# Altium PCB PCB1.PcbDoc (part 2 of 2)
Units mil, origin at the board's own origin, x right, y up, seen from the top; angles counter-clockwise.
Board outline 3308.29 x 3227.82 mil, 2 copper layers (Top Layer, Bottom Layer); 105 components, 80 nets, 433 pads, 304 vias.
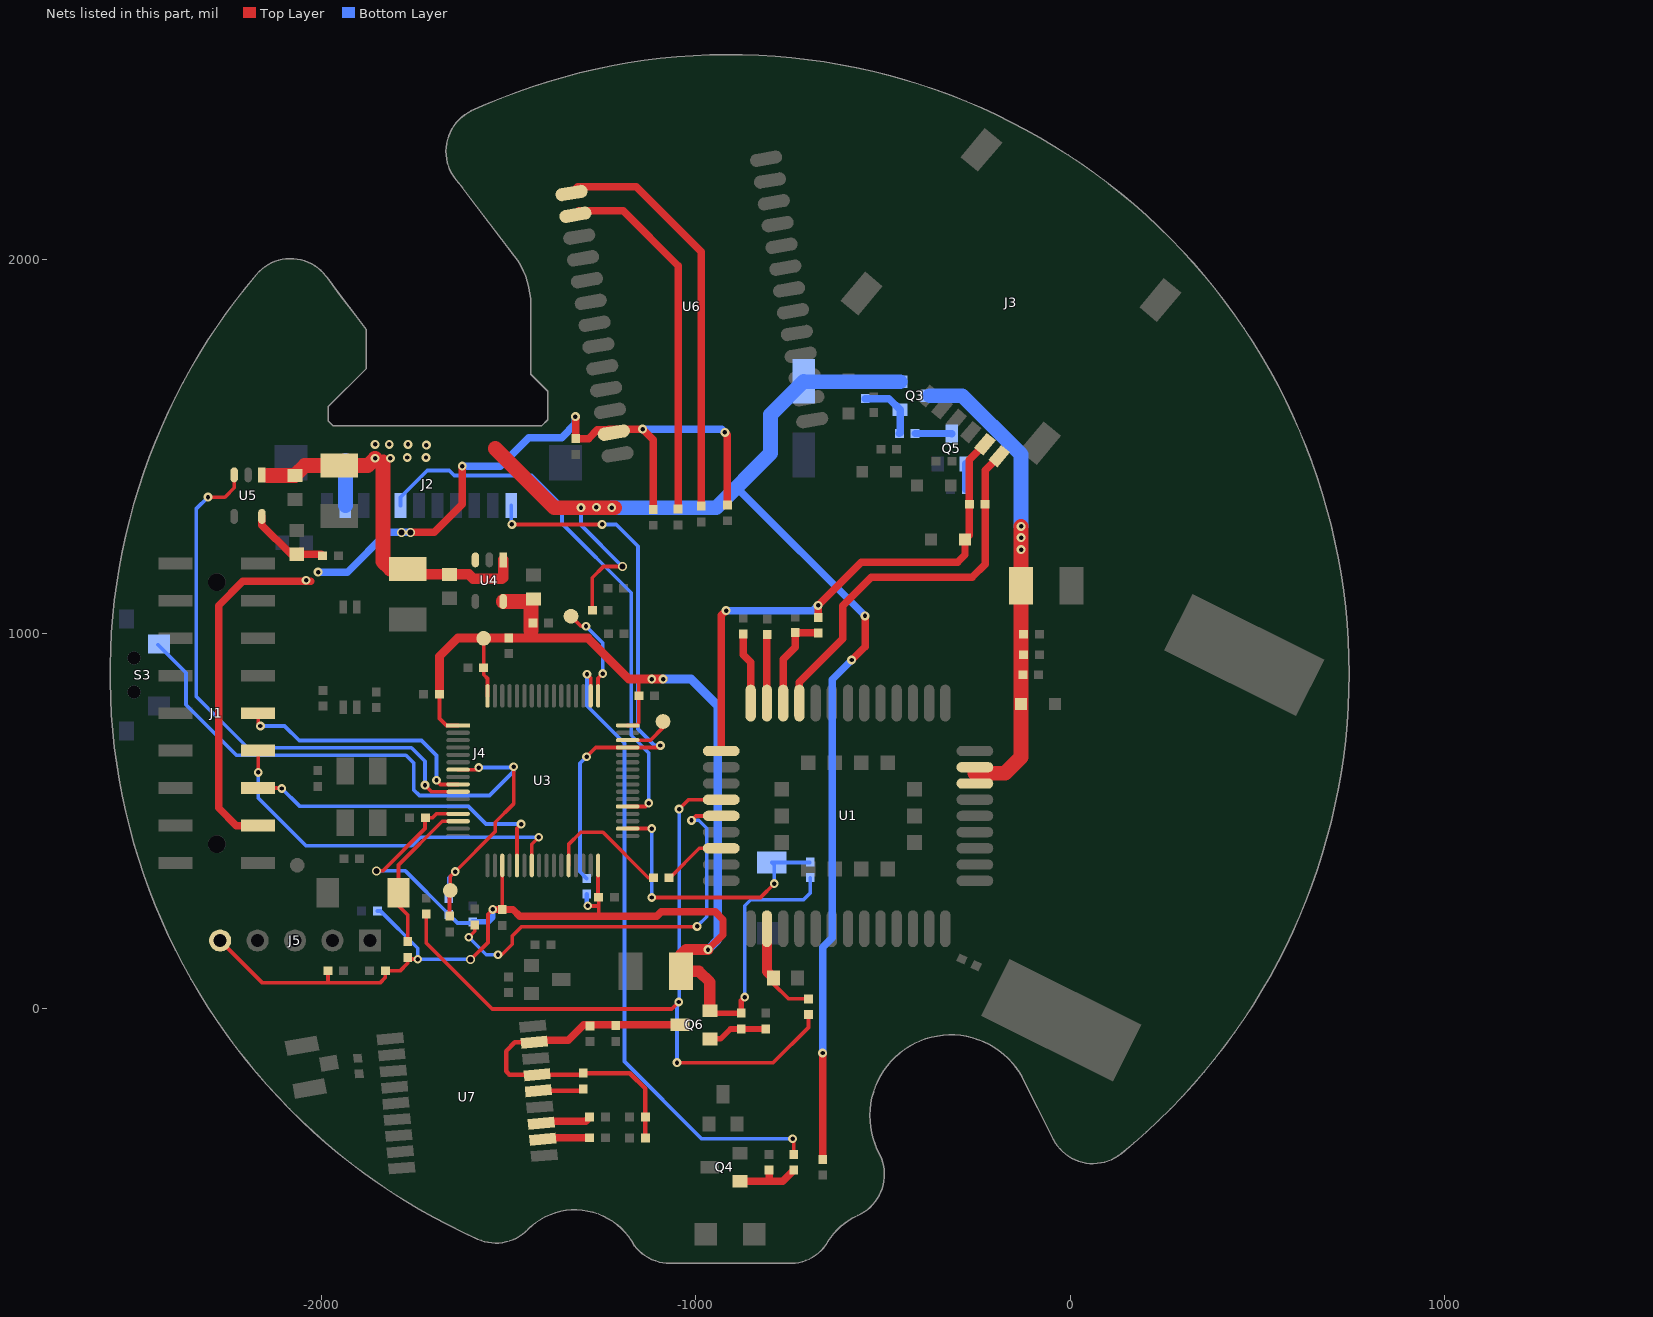
[diagram p2: the nets of this part, all layers, seen from the top]

## Via types
v1: diameter 23.62, hole 11.81, Top Layer to Bottom Layer, 251 vias
v2: diameter 24, hole 16, Top Layer to Bottom Layer, 43 vias
v3: diameter 24, hole 14, Top Layer to Bottom Layer, 10 vias

## Nets (pads, with @x,y where several pads share a name; then routed paths per layer and width w, separated by ;. In a path a pad name is that pad's centre, name@x,y a point inside that pad or via, vN(x,y) a via of type N, cw(c..) or ccw(c..) an arc to the next point about the centre after c; other vN are vias at no path point) (continued)
NetQ3_1: Q3.1 R11.2 R13.2 | length 169.5
  Bottom Layer w19.68: R11.2@-547.32,1627.87 -483.82,1627.87 Q3.1@-454.32,1598.37 -454.32,1536.87 R13.2@-456.32,1534.87
NetQ4_1: Q4.1 R7.2 R12.1 | length 185.7
  Top Layer w20: Q4.1@-882.32,-461.71 -804.32,-461.71 ; R12.1@-804.32,-432.21 -804.32,-461.71 ; R7.2@-738.32,-432.21 -767.82,-461.71 -804.32,-461.71
NetQ5_1: Q5.1 R17.1 | length 67.5
  Bottom Layer w19.68: R17.1@-278.82,1386.37 Q5.1@-278.82,1453.87
NetQ5_3: Q5.3 R13.1 | length 98.4
  Bottom Layer w19.68: R13.1@-414.32,1534.87 -317.32,1534.87 Q5.3@-316.32,1533.87
NetQ6_1: Q6.1 R27.2 R28.2 | length 160
  Top Layer w15: Q6.1@-962.32,-81.71 -933.9,-81.71 -907.32,-55.13 R28.2@-878.32,-55.13 R27.2@-813.32,-55.13
NetR6_1: R6.1 S1.1 U3.34 | length 751.7
  Top Layer w10: U3.34@-1181.94,479.83 v1(-1117.29,479.83) ; v1(-1117.29,295.9) -827.29,295.9 v1(-790.32,332.87)
  Bottom Layer w10: v1(-1117.29,295.9) v1(-1117.29,479.83) ; v1(-790.32,332.87) -790.32,382.36 S1.1@-797.32,389.36 R6.1@-695.83,389.36
NetR9_1: R9.1 S2.1 U3.14 | length 414.4
  Top Layer w10: S2.1@-1812.83,293.32 -1769,249.49 R9.1@-1769,178 ; S2.1@-1793.51,309 -1793.51,382.68 -1676.67,499.52 U3.14@-1634.7,499.52
NetR15_2: R15.2 U1.20 | length 171.9
  Top Layer w10: R15.2@-1071.32,348.87 -1069.13,348.87 -990.83,427.17 U1.20@-931.9,427.17
NetR16_2: R16.2 U1.18 | length 1121.6
  Top Layer w10: v1(-1606.28,189.91) -1590.32,205.87 R16.2@-1590.32,222.87 ; v1@-1526.5,144.5 v1(-1528,143) -1518,143 -1490,171 -1490,193 -1465.09,217.91 -997.28,217.91 v1(-996.28,218.91) ; v1(-1011.28,501.91) -999.4,513.79 U1.18@-931.9,513.79
  Bottom Layer w10: v1(-1606.28,189.91) -1559.36,143 v1(-1528,143) ; v1(-1011.28,501.91) -991.91,501.91 -970.62,480.62 -970.62,244.57 v1(-996.28,218.91)
NetR18_2: R18.2 R19.2 U1.17 | length 2058.8
  Top Layer w10: R18.2@-1719.28,251.91 -1719.28,173.91 -1543.28,-2.09 -1064.28,-2.09 v1(-1045.28,16.91) ; v1(-1050,-145) -793,-145 -699,-51 R19.2@-699,-17 ; v1(-1044.28,531.91) -1019.09,557.09 U1.17@-931.9,557.09
  Bottom Layer w10: v1(-1050,-145) -1050,12.19 v1(-1045.28,16.91) -1044.28,17.91 v1(-1044.28,531.91)
NetR29_1: R29.1 U7.5 | length 121.8
  Top Layer w12: U7.5@-1419.99,-220.28 -1305.46,-220.28 R29.1@-1300.32,-215.13
NetR30_1: R30.1 U7.3 | length 135.9
  Top Layer w20: U7.3@-1412.44,-306.56 -1395.75,-306.56 -1390.32,-301.13 -1294.24,-301.13 R30.1@-1283.32,-290.21
NetR33_1: R33.1 U7.2 | length 127.2
  Top Layer w20: U7.2@-1408.67,-349.7 -1405.1,-346.13 -1284.24,-346.13 R33.1@-1283.32,-345.21
NetR34_2: R34.2 U6.1 | length 1089
  Top Layer w20: U6.1@-1320.85,2187.96 -1314.94,2193.87 -1159.32,2193.87 -985.32,2019.87 R34.2@-985.32,1340.87
NetR37_2: R37.2 U6.2 | length 970
  Top Layer w20: U6.2@-1312.63,2129.48 -1193.93,2129.48 -1047.32,1982.87 R37.2@-1047.32,1338.87
NRST: C21.1 J4.2 R25.2 S3.2 U3.7 | length 1948
  Top Layer w10: C21.1@-1657.28,245.91 -1657.28,312.91 J4.2@-1655.28,314.91 -1655.28,351.91 v1(-1642.28,364.91) -1535.28,471.91 -1535.28,496.91 -1486.28,545.91 v1(-1486.28,644.91) ; U3.7@-1634.7,637.31 -1584.87,637.31 v1(-1579.32,642.87)
  Bottom Layer w10: S3.2@-2436.07,970.68 -2361.2,895.8 -2361.2,810.8 -2226.39,676 -1774,676 -1753,655 -1753,583 -1738,568 -1551,568 -1486.28,632.72 v1(-1486.28,644.91) -1488.32,642.87 v1(-1579.32,642.87) ; R25.2@-1659.28,292.91 -1659.28,347.91 v1(-1642.28,364.91)
OLED_RESET: J1.9 U3.9 | length 667.6
  Top Layer w10: J1.9@-2168.4,788.07 -2168.4,759.95 v1(-2162.32,753.87) ; v1(-1692.32,608.87) -1681.4,597.94 U3.9@-1634.7,597.94
  Bottom Layer w10: v1(-2162.32,753.87) -2097.78,753.87 -2058.78,714.87 -1732.32,714.87 -1692.32,674.87 v1(-1692.32,608.87)
RI: R15.1 U3.28 | length 345.9
  Top Layer w10: U3.28@-1339.42,381.41 -1339.42,437.58 -1307,470 -1248,470 -1126.87,348.87 R15.1@-1113.32,348.87
SCL/SPI1_SCK: J1.5 U3.21 | length 856.9
  Top Layer w10: J1.5@-2168.4,588.07 -2106.52,588.07 v1(-2105.32,586.87) ; U3.21@-1477.22,381.41 -1477.22,480.97 v1(-1466.32,491.87)
  Bottom Layer w10: v1(-2105.32,586.87) -2058.32,539.87 -1608.32,539.87 -1560.32,491.87 v1(-1466.32,491.87)
SDA/SPI1_MOSI: J1.7 U3.23 | length 1020.2
  Top Layer w10: v1(-2168,630) J1.7@-2168,687.67 ; U3.23@-1437.85,381.41 -1437.85,438.34 v1(-1419.32,456.87)
  Bottom Layer w10: v1(-2168,630) -2168,561.55 -2040.45,434 -1758,434 -1735.13,456.87 v1(-1419.32,456.87)
SWCLK: J4.5 U3.49 | length 260.6
  Top Layer w10: J4.5@-1333,1047 -1306,1020 v1(-1293,1020) ; U3.49@-1260.68,834.17 -1260.68,881.51 v1(-1248.32,893.87)
  Bottom Layer w10: v1(-1293,1020) -1248.32,975.32 v1(-1248.32,893.87)
SWDIO: J4.4 U3.46 | length 124.7
  Top Layer w10: U3.46@-1181.94,716.05 -1121.13,716.05 -1087.28,749.91 J4.4@-1087.28,765.91
SYS_LED: R7.1 U3.50 | length 1710.7
  Top Layer w10: v1(-1290.32,891.87) -1280.37,881.91 U3.50@-1280.37,834.17 ; R7.1@-738.32,-390.21 v1@-738.32,-351.13
  Bottom Layer w10: v1(-1290.32,891.87) -1290.32,807.87 -1190.32,707.87 -1190.32,-142.13 -984.32,-348.13 v1(-741.32,-348.13)
SYS_ON/OFF: J2.11 R4.2 U3.45 | length 1529
  Top Layer w10: v1(-1491,1292) v1(-1250,1292) ; v1(-1291.32,671.87) -1266.82,696.37 U3.45@-1181.94,696.37 -1099.82,696.37 v1(-1094.32,701.87)
  Bottom Layer w10: J2.11@-1492.86,1342.79 -1492.86,1293.86 v1(-1491,1292) ; v1@-1292.32,672.87 v1(-1291.32,671.87) -1309,654.19 -1309,364.55 R4.2@-1291.32,346.87 ; v1(-1250,1292) -1212.45,1292 -1154.28,1233.82 -1154.28,745.91 -1110.23,701.87 v1(-1094.32,701.87)
USIM_CLK: R23.2 U1.13 | length 193.2
  Top Layer w20: R23.2@-873.32,999.87 -873.32,943.87 -853.16,923.71 U1.13@-853.16,814.97
USIM_DATA: R22.2 R24.2 U1.11 | length 261.2
  Top Layer w20: U1.11@-766.55,814.97 -766.55,931.64 -734.32,963.87 R24.2@-734.32,1002.87 R22.2@-674.32,1002.87
USIM_GND: C20.1 J3.C5 U1.10 | length 1038.1
  Top Layer w20: U1.10@-723.24,814.97 -723.24,870.95 -607.32,986.87 -607.32,1074.87 -531.32,1150.87 -262.32,1150.87 -227.32,1185.87 C20.1@-227.32,1345.87 -227.32,1436.43 J3.C5@-189.37,1474.38
USIM_RST: R26.2 U1.12 | length 182.4
  Top Layer w20: U1.12@-809.86,814.97 R26.2@-809.86,997.33
USIM_VDD: C20.2 D5.2 J3.C1 R22.1 U1.14 | length 1429.7
  Top Layer w20: U1.14@-931.9,687.02 -931.9,1049.1 v1(-919,1062) ; R22.1@-673.32,1043.87 v1(-673.32,1075.87) -558.32,1190.87 -301.05,1190.87 -281.05,1210.87 D5.2@-281.05,1251.87 -269.32,1263.59 C20.2@-269.32,1345.87 -269.32,1464.87 J3.C1@-227.67,1506.51
  Bottom Layer w20: v1(-919,1062) -687.19,1062 v1(-673.32,1075.87)
VBAT: C14.1 C27.2 C28.1 C30.1 C32.2 J2.2 Q3.2 R5.1 R11.1 R20.1 U4.1 U4.3 U5.1 | length 4797.5
  Top Layer w10: R20.1@-1276.32,1062.87 -1276.32,1149.68 -1246,1180 v2(-1196,1180)
  Top Layer w20: R5.1@-661.32,-403.21 v1(-661.32,-119.32) ; v1(-584,930) -548,966 v1(-548,1048)
  Top Layer w27.56: C28.1@-1769.32,1173.29 -1737.74,1173.29 -1723.1,1158.65 C27.2@-1657.32,1158.65 -1606.01,1158.65 -1594.28,1146.91 -1517.28,1146.91 -1514.28,1149.91 U4.1@-1514.28,1197.41
  Top Layer w39.37: -2143.1,1422.65 C32.2@-2070.32,1422.65 -2043.68,1449.29 C30.1@-1952.32,1449.29 -1875.9,1449.29 v1(-1856.32,1468.87) ; -1835.28,1458.91 -1835.28,1192.91 -1815.65,1173.29 C28.1@-1769.32,1173.29 ; -1535.23,1494.77 -1377.32,1336.87 v1(-1306.32,1336.87) v1(-1224.32,1336.87) v1@-1216.32,1336.87
  Bottom Layer w10: v1(-1306.32,1336.87) -1306.32,1290.32 v2(-1196,1180)
  Bottom Layer w20: -889,1389 v1(-548,1048) ; v1(-661.32,-119.32) -661.32,162.68 -636,188 -636,878 v1(-584,930)
  Bottom Layer w39.37: v1(-1224.32,1336.87) -945.32,1336.87 -800.32,1481.87 -800.32,1585.29 C14.1@-711.32,1674.29 ; C14.1@-710.4,1673.37 Q3.2@-454.32,1673.37
  Bottom Layer w40: J2.2@-1935.78,1342.79 -1935.78,1463.22
  other v1: -1265.32,1337.87 -1815.32,1468.87 -1770.32,1470.87 -1720.32,1470.87 -1719.32,1503.87 -1856.32,1505.87 -1818.32,1505.87 -1768.32,1505.87
VCC3.3V: C1.1 C9.1 C10.1 C13.1 C17.1 C18.1 C22.2 C23.2 C35.1 J4.3 J5.5 Q6.2 R1.1 R4.1 R6.2 R9.2 R10.2 R14.1 R25.1 R28.1 R38.2 R39.2 U3.1 U3.13 U3.19 U3.32 U3.48 U3.64 U4.5 | length 5942.1
  Top Layer w10: J5.5@-2270,181 -2157,68 -1982,68 ; R38.2@-1982,100 -1982,68 ; v2(-1853,367) -1836,367 -1723,480 -1723,508 C13.1@-1722,509 -1703,509 -1692.8,519.2 U3.13@-1634.7,519.2 ; R9.2@-1769,136 R9.2@-1769,131.87 ; v1@-1743.23,131.87 R9.2@-1769,131.87 ; C9.1@-1684.32,838.79 -1684.32,773.87 -1665.88,755.42 U3.1@-1634.7,755.42 ; v2@-1601,130 -1555,176 -1555,251 v1(-1542,264) v1@-1541.79,263.79 ; J4.3@-1566.32,987.87 C1.1@-1566.32,909.79 -1566.32,890.87 -1555.96,880.51 U3.64@-1555.96,834.17 ; C18.1@-1516.59,264.05 U3.19@-1516.59,381.41 ; v1(-1288.28,273.91) -1287.28,272.91 -1260.68,272.91 ; C17.1@-1260.68,296.91 U3.32@-1260.68,381.41 ; -1259.28,248.91 C17.1@-1259.28,296.91 ; U3.48@-1181.94,755.42 U3.48@-1155.76,755.42 ; U3.48@-1155.76,758.78 -1152,762.55 C10.1@-1152,835 -1152,876.91 ; -1982,68 -1843,68 -1829,82 R10.2@-1829,100 -1790,100 -1769,121 R9.2@-1769,131.87
  Top Layer w15: Q6.2@-962.32,-6.71 -955.9,-13.13 R28.1@-878.32,-13.13 -878.32,20.68 v1(-869,30)
  Top Layer w19.68: v1@-1541.79,263.79 C18.1@-1516.32,263.79 -1487.79,263.79 -1469.91,245.91 -1104.12,245.91 -1092.12,257.91 -948.28,257.91 -927.28,236.91 -927.28,196.91 v1(-967.28,156.91)
  Top Layer w23.62: C9.1@-1684.32,838.79 -1684.32,939.87 -1635.32,988.87 R1.1@-1499.32,988.87 -1465,988.87 -1464.51,988.38 -1287.74,988.38 -1178.28,878.91 v1(-1117.28,878.91) v1(-1087.28,878.91)
  Top Layer w30: v1(-967.28,156.91) -1026.28,156.91 -1039.82,143.37 C35.1@-1039.82,98.79 -991.24,98.79 -962.32,69.87 Q6.2@-962.32,-6.71
  Top Layer w39.37: U4.5@-1514.28,1086.41 -1440,1086.41 -1440,1008.19
  Bottom Layer w10: v2(-1853,367) -1775.36,367 R25.1@-1659.28,250.91 -1636.23,227.87 R14.1@-1595,227.87 ; R39.2@-1850,260 -1842,260 -1742.28,160.28 v1(-1742.28,130.91) -1601.09,130.91 v2(-1601,131) ; v1(-869,30) -869,274 -853,290 -712,290 -694.32,307.68 R6.2@-694.32,348.87
  Bottom Layer w11.81: R4.1@-1291.32,304.87 -1291.32,276.96 v1(-1288.28,273.91)
  Bottom Layer w15: R14.1@-1595,231 -1554,231 -1542,243 v1(-1542,264)
  Bottom Layer w23.62: v1(-1087.28,878.91) -1012.28,878.91 -941.28,807.91 -941.28,182.91 v1(-967.28,156.91)
VCC3.3V_GPS_BLE: C33.1 C34.2 Q6.3 R29.2 R35.1 R36.1 U7.6 U7.8 | length 1045.5
  Top Layer w12: U7.8@-1431.32,-90.85 -1483.04,-90.85 -1506.32,-114.13 -1506.32,-168.13 -1497.32,-177.13 U7.6@-1423.77,-177.13 -1304.32,-177.13 R29.2@-1300.32,-173.13 -1176.32,-173.13 -1134.32,-215.13 R35.1@-1134.32,-290.21 R36.1@-1134.32,-346.21
  Top Layer w20: U7.8@-1406.32,-85.13 -1340.32,-85.13 -1299.4,-44.21 Q6.3@-1042.32,-44.21
VCC3.3V_OLED: C29.2 C31.2 C36.1 J1.3 R31.1 R32.1 U5.5 U6.12 | length 2986.9
  Top Layer w20: J1.3@-2168.4,488.07 -2226.43,488.07 -2274.28,535.91 -2274.28,1074.91 -2209.28,1139.91 -2028.28,1139.91 ; U5.5@-2158.32,1313.37 -2158.32,1289.87 -2080.59,1212.13 C31.2@-2065.28,1212.13 -2000.5,1212.13 C29.2@-1996.28,1207.91 ; v2(-1761,1271) -1698,1271 -1623.28,1345.72 v1(-1623.28,1447.91) ; v1(-1321.28,1579.91) -1320.32,1578.96 C36.1@-1320.32,1520.87 -1286.32,1520.87 -1262.51,1544.67 -1230.44,1544.67 -1232.32,1546.56 v1(-1142.01,1546.56) -1113.32,1517.87 R32.1@-1113.32,1331.87 ; v1(-922.32,1537.87) -915.32,1530.87 R31.1@-915.32,1342.87
  Bottom Layer w20: v1(-2008.28,1164.91) -1929.91,1164.91 -1823.82,1271 v2(-1786,1271) v2(-1761,1271) ; v1(-1623.28,1447.91) -1522.28,1447.91 -1446.28,1523.91 -1358.28,1523.91 -1321.28,1560.91 v1(-1321.28,1579.91) ; v1(-1142.01,1546.56) -931.01,1546.56 v1(-922.32,1537.87)
  other v1: -2040.28,1142.91
VCC3.3V_OLED_EN: U3.10 U5.3 | length 1501.6
  Top Layer w10: v1(-2302.32,1364.87) -2257.32,1364.87 -2232.32,1389.87 U5.3@-2232.32,1424.37 ; v1(-1723,596) -1705.26,578.26 U3.10@-1634.7,578.26
  Bottom Layer w10: v1(-2302.32,1364.87) -2334,1333.19 -2334,833.55 -2196.32,695.87 -1759.32,695.87 -1723,659.55 v1(-1723,596)
VCC12V_EN: J2.5 U3.37 | length 1471.8
  Top Layer w10: U3.37@-1181.94,538.89 -1134.3,538.89 v1(-1125.32,547.87)
  Bottom Layer w10: J2.5@-1788.14,1342.79 -1788.14,1364.86 -1717,1436 -1658,1436 -1645,1423 -1438.45,1423 -1357,1341.55 -1357,1294.55 -1172.28,1109.82 -1172.28,728.91 -1125.32,681.96 v1(-1125.32,547.87)
VCC_NB: C2.2 C3.2 C4.2 C5.1 D6.2 Q3.3 U1.42 U1.43 | length 1256.7
  Top Layer w39.37: -254.74,627.87 -174.32,627.87 -131.6,670.59 D6.2@-131.6,812.87 -131.6,1128.64 C5.1@-131.82,1128.87 v1@-131.82,1286.37
  Bottom Layer w39.37: Q3.3@-374.32,1635.87 -288.32,1635.87 -131.32,1478.87 v1(-131.32,1286.87)
  other v1: -131.32,1224.87 -131.32,1256.87
VDD_EXT: C16.2 R19.1 U1.24 | length 264.2
  Top Layer w10: C16.2@-792.1,80.87 -792.1,65.1 -752.87,25.87 R19.1@-699,25.87
  Top Layer w27.56: U1.24@-809.86,212.61 -809.86,98.62 C16.2@-792.1,80.87
pads on no net: ANT1.0 J1.2 J1.4 J1.6 J1.8 J1.10 J1.12 J1.14 J1.16 J1.18 J1.19 J1.20 J2.12 J3.C6 S3.4 S3.5 S3.6 U1.2 U1.3 U1.4 U1.5 U1.6 U1.7 U1.8 U1.9 U1.16 U1.19 U1.21 U1.22 U1.23 U1.25 U1.26 U1.28 U1.29 U1.30 U1.31 U1.32 U1.33 U1.38 U1.39 U1.44 U1.45 U1.46 U1.47 U1.48 U1.49 U1.50 U1.51 U1.52 U1.53 U1.54 U1.55 U1.56 U1.57 U1.58 U3.2 U3.33 U3.35 U3.36 U3.38 U3.41 U3.44 U3.51 U3.52 U3.53 U5.4 U6.3 U6.4 U6.5 U6.6 U6.7 U6.8 U6.9 U6.10 U6.11 U6.14 U6.15 U6.16 U6.18 U6.20 U6.21 U6.22 U6.23 U6.24 U6.25 U6.26 U7.4 U7.7 U7.9 U7.13 U7.15 U7.16 U7.17 U7.18 X1.3 X1.4

## Polygon pours and split planes (outlines as drawn)
GND on Top Layer "Top Solder-No Net" (solid, remove dead copper, pour order 30): -495,-257 -518,-234 -518,755 -463,755 692,1910 789,1813 642.39,1959.61 -351.01,-73.34 -219,-708
GND on Top Layer "Top Solder-No Net" (solid, remove dead copper, pour order 52): -2090,36 -2090,-650 -2039,-701 -2025,-715 -1615,-715 -1615,-19 -1682,48
GND on Top Layer "Top Solder-No Net" (solid, remove dead copper, pour order 56): -2019,2319 -1768,2319 -1629,2180 -80.45,2396.55 473,2180 473,1742.77 498.88,1716.88 499.56,1717.56 499.56,1708.56 459,1668 -505,704 -505,-411 -505,-634 -899,-1028 -1254,-673 -1803,-673 -1803,-643 -1691,-531 -1703,-519 -1703,-10 -2066,-10 -2089,13 -2091,11 -2348,11 -2466,11 -2991,536 -2859,668 -2859,1710
GND on Bottom Layer "Top Solder-No Net" (solid, remove dead copper, pour order 32): 539,1729 -481,709 -481,405 -481,-256 -405,-332 -231,-506 409,-506 1216,-506 1617,-105
GND on Bottom Layer "Top Solder-No Net" (solid, remove dead copper, pour order 42): -2082,20 -2082,-512 -1980,-614 -1947,-647 -1605,-647 -1605,45 -1602,48
GND on Bottom Layer "Top Solder-No Net" (solid, remove dead copper, pour order 54): -2526,2122 -2143.05,2111 136.02,2425 287,2167 287,2111 597,1801 508,1712 508,1699 508,1696 490,1678 -473,715 -473,-693 -1503.38,-693 -1614.56,-581.82 -1611,-578.27 -1611,31 -1836,31 -1849,18 -1856,11 -2083,11 -2505,11 -2509,7 -2765,263 -2765,594

## Keep-outs
Keep-Out Layer:
  circle w10: c-2090.39,1680.23 r62.99
  circle w10: c271.82,1680.23 r62.99
  circle w10: c516.07,330.38 r62.99
  circle w10: c-2248.32,1555.79 r64.96
  circle w10: c387.51,73.5 r64.96
  lines w10: -2173.33,-171.61 ccw(c-911.19,891.21) -1582.32,-616.16 ; -2172.6,-172.46 cw(c-915.52,893.62) -2172.6,1959.71 cw(c-2082.37,1883.5) -1988.33,1954.97 ; -1987.68,1955.63 -1984.14,1950.9 -1950.28,1905.43 -1899.1,1838.5 -1879.42,1812.91 -1879.42,1723.69 -2009.32,1593.79 -2009.32,1555.29 -2009.57,1555.04 -1968,1555.04 -1518,1555.04 -1485.96,1555.04 -1440.44,1600.56 -1440.44,1692.83 -1440.44,1878.38 ccw(c-1656.39,1878.38) -1484.61,2009.25 ; -1633.35,2204.65 -1622.53,2189.88 -1618.59,2184.96 -1484.67,2009.32 ; -1633.31,2204.6 cw(c-1546.53,2288.12) -1598.95,2396.55 ; -1599.74,2396.19 cw(c-909.59,888.75) 136.02,2175.37 cw(c-909.34,893.62) 136.02,-388.13 ; -1582.13,-616.24 ccw(c-1533.15,-509.76) -1448.27,-590.59 ; -1448.31,-590.62 cw(c-1382.86,-650.18) -1436.48,-579.79 -1426.66,-571.93 ; -1426.76,-572 cw(c-1322.08,-716.6) -1163.88,-633.9 ; -1163.83,-633.98 ccw(c-1068.12,-560.54) -1068.33,-681.18 ; -1068.39,-681.18 -744.57,-681.18 ; -744.5,-681.18 ccw(c-748.17,-564.35) -647.05,-622.97 ; -647.13,-623.1 cw(c-495.55,-715.62) -567.5,-553.27 ; -567.33,-553.2 ccw(c-616.59,-443.6) -512.32,-383.88 ; -521.12,-363.35 cw(c-318.62,-287.23) -128.5,-184.01 ; -521.15,-363.27 -518.19,-371.14 -512.29,-383.94 ; -128.43,-184.13 -44.77,-350.47 ; -44.82,-350.38 ccw(c60.99,-295.54) 136.31,-387.89

## Other copper
Top Layer:
  rectangle net VBAT: -1882,1453 -1686.32,1516
  rectangle net VCC_NB: -305.32,585.87 -207.32,655.87
  rectangle net VCC3.3V_OLED: -2059.28,1125.91 -1984.28,1217.91
  rectangle net VCC3.3V_OLED: -1788,1261 -1752,1282
  rectangle net VCC3.3V: -1459.28,982.91 -1420.28,1012.91
  rectangle net VBAT: -1598.28,1144.91 -1578.28,1207.91
  rectangle net VCC3.3V: -1157,751 -1148,773
  rectangle net VBAT: -1699,1471 -1536,1515
Bottom Layer:
  rectangle net VCC3.3V: -1131.28,865.91 -1075.28,891.91
  rectangle net VBAT: -1330.32,1315.87 -1199.32,1354.87
  rectangle net VBAT: -1899.32,1453 -1686.32,1519
  rectangle net VCC_NB: -150.32,1187.87 -111.32,1305.87
  rectangle net VCC3.3V_OLED: -2055.28,1127.91 -1993.28,1182.91
  rectangle net VBAT: -1944,1419 -1864,1483

## Silkscreen, mask and mechanical layers (free items; w line width, h text height)
Top Overlay:
  lines w5: -2227.84,789.8 -2178.35,789.8 ; -2177.84,439.29 -2177.84,1139.29
  text "SCLK" at -1324,1099 h30 r270
  text "VCC" at -1604,1018 h30
  text "SDIO" at -1050,787 h30 r270
  text "RST" at -1680,378 h30
  text "GND" at -2104,353 h30 r270
  text "+" at 29,76 h60
Bottom Overlay:
  lines w5: -2557.32,1307.79 1455.68,1307.79 ; -2543.32,478.79 1333.68,478.79
  text "Megic_Key_Control_V2.0_20190527" at -349,839 h60
Top Solder:
  rectangle: -421.28,2394.91 -356.28,2427.91
  rectangle: -527.28,2382.91 -403.28,2460.91
  rectangle: -569.28,2361.91 -524.28,2475.91
  rectangle: -655.28,2358.91 -562.28,2499.91
  rectangle: -699.28,2347.91 -648.28,2501.91
  rectangle: -809.28,2339.91 -694.28,2507.91
  rectangle: -928.28,2323.91 -787.28,2493.91
  rectangle: -1072.28,2462.91 -779.28,2504.91
  rectangle: -1219.28,2467.91 -905.28,2490.91
  rectangle: -1305.28,2311.91 -919.28,2471.91
  rectangle: -1397.28,2297.91 -992.28,2448.91
  rectangle: -1466.28,2270.91 -1093.28,2424.91
  rectangle: -1524.28,2251.91 -1280.28,2399.91
  rectangle: -1580.28,2320.91 -1323.28,2379.91
  rectangle: -1618.28,2224.91 -1432.28,2354.91
  rectangle: 512.72,1142.91 586.72,1581.91
  rectangle: 488.72,1279.91 536.72,1506.91
  rectangle: 555.72,1116.91 621.72,1499.91
  rectangle: 598.72,1218.91 647.72,1394.91
  rectangle: 628.72,1125.91 674.72,1287.91
  rectangle: 599.72,1032.91 691.72,1247.91
  rectangle: 474.72,1214.91 551.72,1458.91
  rectangle: 444.72,1128.91 477.72,1419.91
  rectangle: 418.72,1158.91 527.72,1361.91
  rectangle: 398.72,1136.91 428.72,1308.91
  rectangle: 367.72,650.91 697.72,1272.91
  rectangle: 334.72,648.91 386.72,1218.91
  rectangle: 315.64,644.91 353.72,1148.91
  rectangle: 230.72,810.91 353.72,1005.91
  rectangle: 258.72,974.91 356.72,1041.91
  rectangle: 282.72,996.91 352.72,1120.91
  rectangle: 195.72,801.91 336.72,940.91
  rectangle: 167.72,800.91 221.72,872.91
  rectangle: 146.72,485.91 677.72,811.07
  rectangle: 121.72,482.91 157.72,780.91
  rectangle: 101.72,485.91 146.72,726.91
  rectangle: 81.72,482.91 121.72,692.91
  rectangle: 59.72,479.91 94.72,639.91
  rectangle: 29.72,475.91 68.72,592.91
  rectangle: -2.28,467.91 41.72,532.91
  rectangle: -16.28,353.91 643.72,507.91
  rectangle: -45.28,240.91 576.72,447.91
  rectangle: 475.72,308.91 608.72,428.91
  rectangle: -73.28,211.91 -18.28,396.91
  rectangle: -110.28,208.91 -45.28,327.91
  rectangle: -140.28,37.91 494.72,256.91
  rectangle: 444.72,134.91 531.72,295.91
  rectangle: 497.72,195.91 560.72,292.91
  rectangle: 440.72,100.91 509.72,174.91
  rectangle: -169.28,84.91 -99.28,209.91
  rectangle: -197.28,-85.09 302.72,145.91
  rectangle: -233.28,-49.09 -98.28,77.91
  rectangle: -250.28,-49.09 -185.28,28.91
  rectangle: -267.28,-64.09 363.72,-11.09
  rectangle: 286.72,-36.09 451.72,64.91
  rectangle: 187.72,-95.09 396.72,-2.09
  rectangle: 65.72,-144.09 358.72,-52.09
  rectangle: -149.28,-132.09 126.72,-65.09
  rectangle: -110.28,-180.09 313.72,-100.09
  rectangle: -93.28,-240.09 284.72,-165.09
  rectangle: -58.28,-289.09 227.72,-219.09
  rectangle: -26.28,-348.09 157.72,-275.09
  rectangle: -0.28,-375.09 109.72,-326.09
  lines w39.37: -285.54,-53.46 553.86,1625.34
  lines w43.31: -127.28,-137.09 -43.61,-303.43
  lines w47.24: -1597.28,2371.91 cw(c-907.12,864.48) -284.36,2400.98 ; -273.55,-51.16 cw(c-308.04,-264.73) -136.82,-132.51 ; -37.26,-303.16 ccw(c78.65,-275.46) 42.72,-389.09 ; 46.72,-389.27 ccw(c51.02,-270.18) 164.65,-306.1
  lines w49.21: -1638.28,2258.91 cw(c-1519.53,2279.03) -1602.27,2366.56 ; -1598.32,2204.43 -283.28,2394.94 ; 129.7,-361.99 ccw(c-937.26,901.84) 552.72,1619.91
  lines w51.18: -1638.28,2258.91 -1598.32,2204.43
Bottom Solder:
  rectangle: -460.28,2386.91 -367.28,2447.91
  rectangle: -558.28,2376.91 -443.28,2460.91
  rectangle: -665.28,2357.91 -552.28,2484.91
  rectangle: -760.28,2347.91 -661.28,2518.91
  rectangle: -849.28,2331.91 -751.28,2513.91
  rectangle: -939.28,2321.91 -849.28,2513.91
  rectangle: -1071.28,2303.91 -926.28,2515.91
  rectangle: -1191.28,2276.91 -1056.28,2497.91
  rectangle: -1258.28,2277.91 -1123.28,2476.91
  rectangle: -1370.28,2270.91 -1200.28,2459.91
  rectangle: -1438.28,2256.91 -1290.28,2433.91
  rectangle: -1487.28,2245.91 -1394.28,2409.91
  rectangle: -1517.28,2371.91 -1432.28,2394.91
  rectangle: -1578.28,2347.91 -1440.28,2387.91
  rectangle: -1624.28,2227.91 -1455.28,2354.91
  rectangle: 530.72,1516.91 575.72,1583.91
  rectangle: 507.72,1498.91 591.72,1535.91
  rectangle: 487.72,1441.91 609.72,1507.91
  rectangle: 465.72,1397.91 625.72,1448.95
  rectangle: 440.72,1325.91 635.72,1415.91
  rectangle: 411.72,1274.91 658.72,1357.91
  rectangle: 384.72,1197.91 676.72,1301.91
  rectangle: 351.72,1133.91 692.72,1245.91
  rectangle: 329.72,1029.91 702.72,1191.91
  rectangle: 306.72,1014.91 333.72,1146.91
  rectangle: 283.72,1000.91 316.72,1087.91
  rectangle: 265.72,976.91 304.72,1042.91
  rectangle: 245.72,937.91 291.72,1013.91
  rectangle: 229.72,877.91 288.72,963.91
  rectangle: 278.72,778.91 709.72,1055.91
  rectangle: 210.21,543.91 686.72,937.91
  rectangle: 183.72,528.91 222.72,910.91
  rectangle: 160.72,509.91 200.72,850.91
  rectangle: 140.72,509.91 160.72,804.91
  rectangle: 118.72,-41.09 430.72,764.91
  rectangle: 369.72,29.91 484.72,596.91
  rectangle: 475.72,114.91 520.72,573.91
  rectangle: 469.72,97.91 503.72,127.91
  rectangle: 411.72,6.91 458.72,48.91
  rectangle: 499.72,168.91 555.72,583.91
  rectangle: 542.72,246.91 585.72,570.91
  rectangle: 581.72,301.91 609.72,562.91
  rectangle: 609.72,384.91 642.72,562.91
  rectangle: 630.72,489.91 664.72,562.91
  rectangle: 679.72,754.91 699.72,787.91
  rectangle: 91.72,-23.09 121.72,721.91
  rectangle: 70.72,-41.09 118.72,671.91
  rectangle: 40.72,-5.09 91.72,625.91
  rectangle: 18.72,4.91 72.72,571.91
  rectangle: -9.28,-378.09 111.72,512.91
  rectangle: 91.72,-335.09 186.72,-5.09
  rectangle: 161.72,-278.09 222.72,-8.09
  rectangle: 196.72,-250.09 253.72,-13.09
  rectangle: 212.72,-89.09 400.72,-18.09
  rectangle: 170.72,-136.09 364.72,-77.09
  rectangle: 199.72,-180.09 327.72,-116.09
  rectangle: 217.72,-226.09 282.72,-156.09
  rectangle: 105.72,-367.97 122.77,-333.09
  rectangle: -266.28,-75.09 29.72,7.91
  rectangle: -170.28,-105.09 49.72,-59.09
  rectangle: -129.28,-178.09 -55.28,-58.09
  rectangle: -63.28,-291.09 40.72,-87.09
  rectangle: -32.28,-337.09 49.72,-236.09
  rectangle: -106.28,-223.09 -31.28,-146.09
  rectangle: -242.28,-48.09 80.72,44.91
  rectangle: -227.28,-29.09 125.72,78.91
  rectangle: -197.28,72.91 9.72,126.91
  rectangle: -181.28,107.91 47.72,164.91
  rectangle: -162.28,137.91 47.72,191.91
  rectangle: -144.29,175.91 24.72,228.91
  rectangle: -131.28,216.91 61.72,257.91
  rectangle: -112.28,253.91 33.72,287.91
  rectangle: -96.28,279.91 41.72,328.91
  rectangle: -82.28,310.91 53.72,353.91
  rectangle: -69.28,352.91 25.72,384.91
  rectangle: -55.28,374.91 13.72,420.91
  rectangle: -32.28,407.91 47.72,475.91
  lines w39.37: -285.47,-53.44 553.93,1625.36
  lines w43.31: -127.21,-137.07 -43.54,-303.41
  lines w47.24: -1597.28,2371.91 cw(c-907.12,864.48) -284.36,2400.98 ; -273.48,-51.15 cw(c-307.97,-264.71) -136.75,-132.49 ; -37.19,-303.14 ccw(c78.72,-275.44) 42.79,-389.07 ; 46.79,-389.26 ccw(c51.09,-270.16) 164.72,-306.09
  lines w49.21: -1638.28,2258.91 -1598.32,2204.43 -283.28,2394.94 ; 129.77,-361.97 ccw(c-937.19,901.86) 552.79,1619.93
  lines w50.39: -1638.28,2258.91 cw(c-1519.53,2279.03) -1602.27,2366.56